# Altium PCB MCORD_AFE.PCBDOC (part 3 of 3)
Units mil, origin at the board's own origin, x right, y up, seen from the top; angles counter-clockwise.
Board outline 2755.91 x 787.4 mil, 4 copper layers (TOP, G1, PWR, BOT), stack 58.685 mil thick; 115 components, 78 nets, 421 pads, 239 vias.
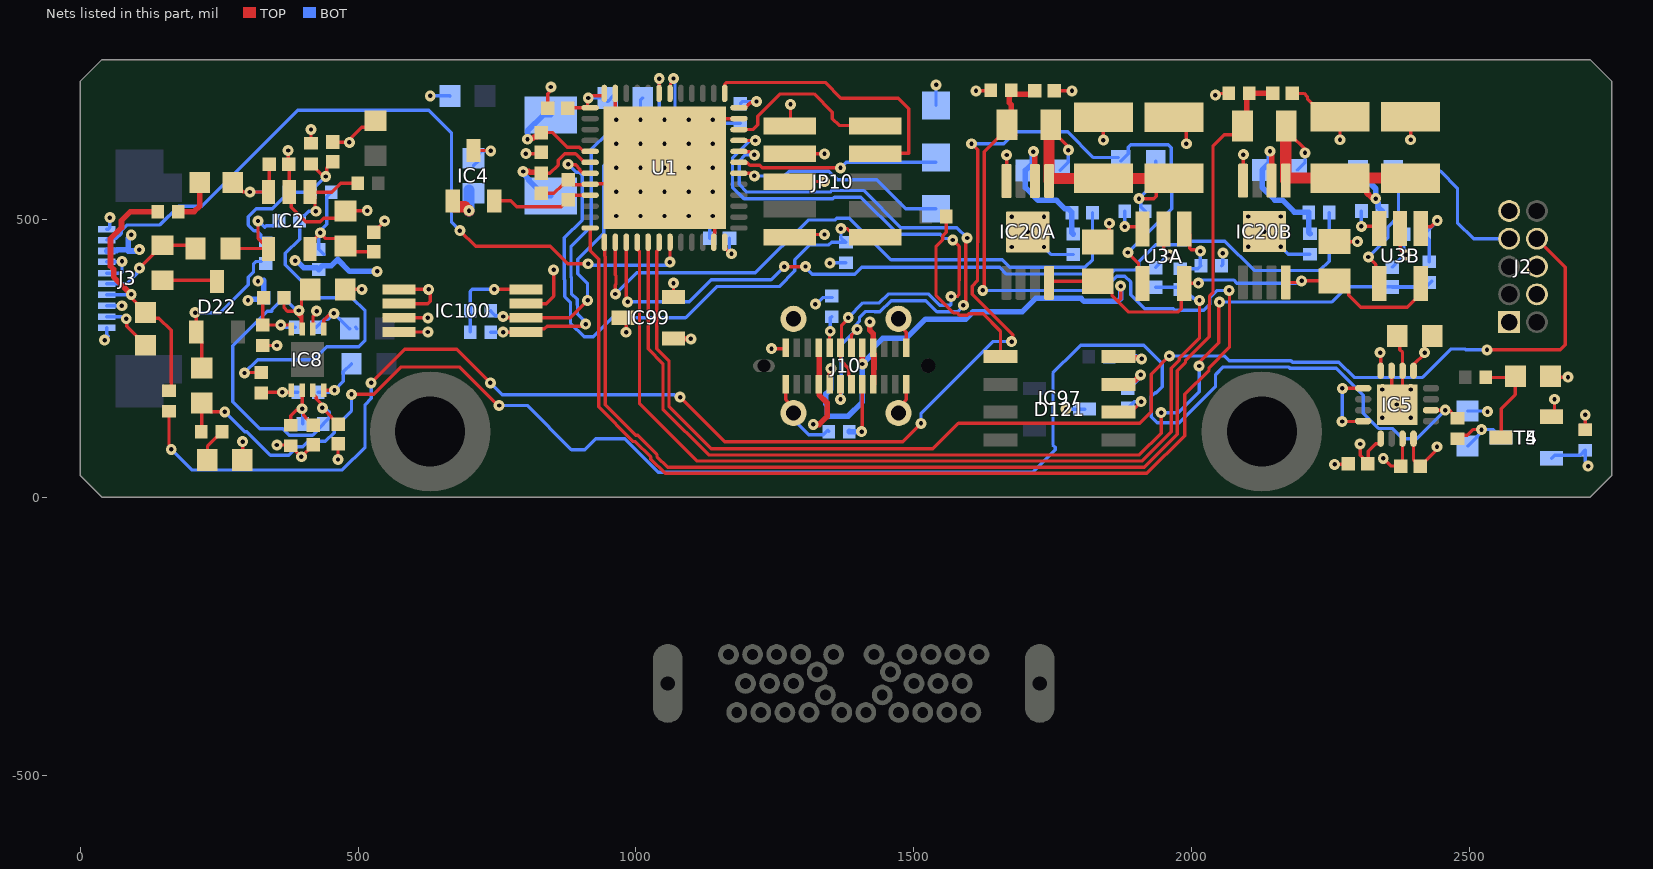
[diagram p4: the nets of this part, all layers, seen from the top]

## Via types
v1: diameter 19.68, hole 7.87, TOP to BOT, tented both sides, 239 vias

## Nets (pads, with @x,y where several pads share a name; then routed paths per layer and width w, separated by ;. In a path a pad name is that pad's centre, name@x,y a point inside that pad or via, vN(x,y) a via of type N, cw(c..) or ccw(c..) an arc to the next point about the centre after c; other vN are vias at no path point) (continued)
GND: C4.1 C16.1 C26.1 C42.1 C43.1 C44.1 C45.1 C46.1 C48.1 C49.1 C54.1 C92.1 C93.1 C94.1 C95.1 C97.1 C98.1 C100.1 C101.1 C130A.1 C130B.1 C131A.1 C131B.1 C132A.1 C132B.1 C133A.1 C133B.1 C134A.1 C134B.1 C284.1 C285.1 C286.1 C290.1 C291.1 C292.1 D121.3 IC2.2 IC4.3 IC5.7 IC5.14 IC5.15 IC5.17 IC8.6 IC20A.4 IC20A.9 IC20B.4 IC20B.9 IC97.2 IC99.3 IC100.1 IC100.2 IC100.3 IC100.4 IC100.7 J2.1 J2.4 J2.6 J3.1 J3.4 J3.5 J3.8 J3.9 J3.10 J10.A1 J10.A12 J10.B1 J10.B12 J10.Shell JP10.3 JP10.5 JP10.9 R18.1 R19.1 R63.2 R67.2 R86A.1 R86B.1 R88A.2 R88B.2 R105.1 R107.1 R108.1 R154A.1 R154B.1 T4.2 T5.2 TP44.1 U1.8 U1.23 U1.35 U1.47 U1.49 U3A.2 U3B.2 | length 4480.9
  TOP w6: v1(83,321) 83.93,320.07 83.93,307.29 C95.1@117.74,273.48 ; C54.1@291.79,67 292.44,67.65 v1(292.44,100) ; R107.1@328.79,272.82 328.94,272.97 v1(353.99,272.97) ; v1(353.99,93.87) 376.7,93.87 378.57,92 R105.1@379.11,92.54 379.11,91.65 384.68,86.08 v1(398,72.76) C97.1@419.11,93.87 ; v1(374.28,623.69) 374.28,600.42 C98.1@375.61,599.09 376.39,598.31 IC2.2@376.39,548.9 380.06,545.23 380.06,521.76 406.21,495.61 431.99,495.61 438.14,501.77 C44.1@468.39,501.77 ; R108.1@415.37,636.61 v1(415.37,661.46) ; IC8.6@418.95,302.63 418.95,324.35 425.58,330.98 v1(425.58,334.68) v1@428.2,337.3 ; C100.1@454.94,639.47 456.08,638.32 v1(484.31,638.32) ; v1(464.03,67.92) 464.03,95.25 C94.1@464.23,95.44 ; C93.1@477.1,373.49 477.53,373.92 v1(506.89,373.92) ; C44.1@477.53,514.8 478.55,513.78 480.22,515.44 v1(516.65,515.44) ; v1@480,639 481.28,639 486.93,644.65 486.93,645.93 506.61,665.61 520.04,665.61 C42.1@531.78,677.35 ; C92.1@528.46,477.36 548,496.9 v1(548,497) ; IC100.4@573.83,297.15 v1(625.81,297.15) ; IC100.3@573.83,322.74 v1(625.81,322.74) ; IC100.2@573.83,348.33 625.81,348.33 629.92,352.44 v1@629.92,365.29 ; IC100.1@573.83,373.92 v1(626.98,373.92) ; IC4.3@707.69,623.69 738.31,623.69 v1(738.79,623.21) ; v1(802,618) 802.11,618.11 826.97,618.11 C4.1@829.47,620.61 ; IC100.7@802.17,348.33 838.44,348.33 852,361.89 v1(852,409) ; C26.1@829.47,547.1 852.56,547.1 867.09,561.64 868.8,561.64 C16.1@878,570.84 886.83,562.01 903.09,562.01 903.38,562.3 916.93,562.3 U1.8@917.66,563.04 918.35,563.73 944.83,563.73 973.66,592.57 v1(1008.21,592.57) v1(1051.52,592.57) ; C292.1@841.54,699.78 841.54,725.6 844.38,728.44 844.38,735.38 v1(847,738) ; U1.47@962.94,726.43 962.94,681.15 v1(964.91,679.18) v1(1008.21,635.87) v1(1051.52,592.57) ; IC99.3@976.72,322.74 982.3,317.16 v1(982.3,296.73) ; U1.23@1140.1,458.71 1140.84,459.44 1140.84,472.99 1141.81,473.96 1141.81,502.28 v1(1138.13,505.95) v1(1094.83,549.26) v1(1051.52,592.57) ; U1.35@1185.38,681.15 1140.1,681.15 v1(1094.83,635.87) v1(1051.52,592.57) ; v1(1244,267.2) 1267.98,267.2 J10.B1@1269.69,268.9 ; J10.A12@1269.69,203.54 1269.69,175.71 1283.46,161.93 J10.Shell@1283.46,151.57 ; JP10.9@1277,467.84 1281.76,472.61 v1(1339.28,472.61) ; JP10.5@1277,567.84 v1(1339.28,567.84) ; JP10.3@1277,617.84 v1(1339.28,617.84) ; J10.Shell@1472.44,151.57 1472.44,161.93 1486.22,175.71 J10.A1@1486.22,203.54 ; J10.Shell@1472.44,320.87 1472.44,310.51 1486.22,296.73 J10.B12@1486.22,268.9 ; v1(1611.86,731.11) 1636.99,731.11 R154A.1@1638.21,732.33 ; IC20A.4@1666.57,568.8 1667.01,569.24 v1(1667.01,615.67) ; C134A.1@1752.97,731.11 v1(1784.46,731.11) ; C130A.1@1795.65,691.09 1802.95,683.79 C130A.1@1840.96,683.79 v1(1840.96,642.45) ; C132A.1@1830.96,459.35 1832.16,459.35 1851.79,478.99 v1(1851.79,492.82) ; IC97.2@1868.44,153.03 1890.03,153.03 v1(1909,172) ; U3A.2@1948.96,482.67 1949.59,482.04 1949.59,445.69 v1(1959.85,435.43) ; C131A.1@1967.96,683.79 1990.37,661.38 v1(1990.37,635.87) ; v1(2042.61,723.41) 2042.61,722.72 2046.31,726.43 R154B.1@2066.65,726.43 ; IC20B.4@2092.36,569.43 2092.8,569.87 v1(2092.8,616.3) ; C134B.1@2180.79,726.43 2201.99,726.43 2208.11,720.3 2208.11,716.48 2240.17,684.42 C130B.1@2266.75,684.42 v1(2266.75,643.08) ; C132B.1@2256.75,459.98 2256.89,459.84 v1(2297.98,459.84) ; v1(2257,59) 2279.96,59 C101.1@2281.15,60.19 ; v1(2344.54,69.97) 2358.32,56.19 2375.14,56.19 C46.1@2376.01,55.32 2379.26,58.57 IC5.7@2379.26,105.41 ; IC5.15@2359.58,227.45 2359.58,176.27 IC5.17@2369.42,166.43 2379.26,176.27 IC5.14@2379.26,227.45 2379.26,260.39 2374.5,265.15 2374.5,285.39 C48.1@2369.57,290.32 ; U3B.2@2374.75,483.3 2375.38,482.67 2375.38,446.32 v1(2385.64,436.05) ; v1(2393.75,643.08) C131B.1@2393.75,684.42 ; C45.1@2645.28,217.61 2646.89,216 v1(2677,216) ; T4.2@2647.25,144.78 2652.58,150.11 v1(2652.58,176.27) ; v1(2708,148) 2708,121.75 R63.2@2708.21,121.54
  BOT w6: v1(44.13,282.58) 44.13,283.09 50.41,289.37 47.69,292.09 J3.10@47.69,305.12 ; J3.9@47.69,324.8 75.5,324.8 79.3,321 v1(83,321) ; J3.8@47.69,344.49 v1(75.16,344.49) ; J3.5@47.69,403.15 73.23,403.15 75.5,405.41 v1(75.5,424.25) 74.98,423.74 48.21,423.74 J3.4@47.69,423.23 ; J3.1@47.69,482.28 50.69,482.28 53.6,485.19 v1(53.6,502.95) ; v1(629.92,721.98) 665.09,721.98 C43.1@665.57,721.5 ; C285.1@707.69,596.13 716.89,605.34 716.89,617.59 722.52,623.21 v1(738.79,623.21) ; v1(1008.21,679.18) 1008.21,714.27 C286.1@1012.15,718.21 ; C290.1@1132.88,466.1 1132.88,497 1138.13,502.25 v1(1138.13,505.95) ; v1(1138.13,679.18) 1141.81,679.18 1148.49,672.5 C291.1@1188,672.5 ; J10.Shell@1283.46,151.57 1283.46,139.89 1311.2,112.16 1337.39,112.16 1345.52,120.29 1346.91,118.9 R18.1@1346.91,118.11 ; v1@1322.82,344.66 v1@1322.82,346.07 ; v1(1322.82,347.47) v1@1322.82,346.07 ; R19.1@1353.06,359.13 1335.89,359.13 v1@1322.82,346.07 ; TP44.1@1540,704.94 v1(1540,741.75) ; v1(1734.09,450.1) 1747.63,436.57 R86A.1@1786.96,436.57 ; v1(1773.95,158.35) D121.3@1807.42,158.35 ; C284.1@1885.15,160.32 1896.83,172 v1(1909,172) ; C133A.1@1934.96,413.38 1935.16,413.38 1946.13,424.35 1946.13,424.55 1957.01,435.43 v1(1959.85,435.43) ; R88A.2@2053.56,416.12 2056,418.56 v1(2056,439) ; v1(2159.88,450.73) 2173.42,437.2 R86B.1@2212.75,437.2 ; C133B.1@2360.75,414.01 2360.95,414.01 2371.92,424.98 2371.92,425.18 2382.8,436.05 v1(2385.64,436.05) 2385.64,439.76 2381.84,443.56 R88B.2@2381.84,472.87 ; C49.1@2496.23,155.2 2530.8,155.2 v1(2532,154) ; T5.2@2647.25,69.97 2652.94,75.67 2698.56,75.67 2707.42,84.53 R67.2@2708.21,84.53 2708.21,64.5 2713.01,59.7 v1(2713.01,56)
  other v1: 2342.99,142.65 2393.99,142.65 2368.97,166.88 2342.99,193.72 2393.99,193.72 1675.83,450.1 2101.61,450.73 1704.96,477.27 2130.75,477.9 1675.83,504.43 1734.09,504.43 964.91,505.95 1008.21,505.95 1051.52,505.95 1094.83,505.95 2101.61,505.06 2159.88,505.06 964.91,549.26 1008.21,549.26 1051.52,549.26 1138.13,549.26 964.91,592.57 1094.83,592.57 1138.13,592.57 964.91,635.87 1051.52,635.87 1138.13,635.87 1051.52,679.18 1094.83,679.18
I_SIPM_MEAS0: C133A.2 R68A.2 U1.16 | length 1659.3
  TOP w6: U1.16@1002.31,458.71 1002.31,446.84 1006.39,442.76 1006.39,168.69 1110.08,65 1910.29,65 1962.84,117.55 1962.84,231.9 1977.69,246.75 1977.69,250.32 2014,286.63 v1(2014,354)
  BOT w6: C133A.2@1934.96,377.55 1975.57,377.55 R68A.2@1979.39,373.73 1987.8,365.33 1995.34,365.33 2004.05,356.62 2011.38,356.62 v1(2014,354)
I_SIPM_MEAS1: C133B.2 R68B.2 U1.17 | length 2001.6
  TOP w6: U1.17@1021.99,458.71 1021.99,266.8 1048.6,240.19 1048.6,158.16 1130.76,76 1905.73,76 1945,115.27 v1(1945,152) ; v1@1944,152 v1@1944,153 ; v1@2013.24,232.5 v1(2013.24,236.15) 2013.24,242.38 2048.5,277.65 2048.5,349.5 v1(2050,351)
  BOT w6: v1(1945,152) 1975.83,152 2013.24,189.41 v1(2013.24,236.15) ; v1(2050,351) 2050.24,351.24 2252.33,351.24 2279.49,378.39 2403.75,378.39 2404.35,377.79 ; C133B.2@2360.75,377.79 2404.35,377.79 ; R68B.2@2431.84,388.37 2421.25,377.79 2404.35,377.79
NetC4_2: C4.2 Q1.1 U1.5 | length 200.8
  TOP w6: C4.2@829.47,656.04 850.52,656.04 876.72,629.84 898.05,629.84 905.79,622.09 U1.5@917.66,622.09
  TOP w10: v1(805,644) 806.85,645.85 814.75,645.85 817.74,648.84 822.27,648.84 C4.2@829.47,656.04
  BOT w10: v1(805,644) 805,659.28 833.46,687.75 Q1.1@847,687.75
NetC26_2: C26.2 Q1.2 U1.6 | length 220.4
  TOP w6: C26.2@829.47,582.54 845.12,582.54 860.16,597.58 860.16,606.39 871.61,617.84 891.4,617.84 906.83,602.41 U1.6@917.66,602.41
  TOP w10: v1(797,586) 807,586 808.73,584.27 827.74,584.27 C26.2@829.47,582.54
  BOT w10: v1(797,586) 797,582.27 807.87,571.41 807,570.54 835.46,542.08 Q1.2@847,542.08
NetC44_2: C44.2 C92.2 IC2.5 L1.1 R100.2 | length 257.2
  TOP w6: IC2.5@413.8,446.54 413.8,456.38 432.39,474.98 v1(432.39,475.77) ; v1@432.39,473.91 440.76,465.55 C44.2@468.39,465.55 ; C44.2@477.53,451.8 487.8,441.54 C92.2@528.46,441.54
  BOT w6: L1.1@438.61,436.71 438.61,437.1 429.79,445.92 L1.1@429.4,445.92 429.4,469.07 432.39,472.06 v1(432.39,475.77) 432.39,479.47 443.57,490.64 443.57,540.48 R100.2@451.98,548.9
NetC45_2: C45.2 R110.1 T4.3 | length 186.3
  TOP w6: R110.1@2528.91,215.43 2572.23,215.43 2582.29,225.49 2582.29,184.72 2556.7,159.13 T4.3@2556.7,107.38
NetC49_2: C49.2 R66.1 T5.3 | length 133.4
  TOP w6: R66.1@2478.91,103.95 2477.89,104.97 R66.1@2478.12,105.2 2484.39,111.47 2495.81,111.47 2505.99,121.65 v1(2521.18,121.65)
  BOT w6: C49.2@2496.23,92.21 2497.21,92.21 2512.91,107.91 2512.91,108.89 2518.57,114.54 2518.57,119.04 v1(2521.18,121.65) 2542.42,121.65 T5.3@2556.7,107.38
NetC54_2: C54.2 R71.1 | length 62.5
  TOP w6: C54.2@228.8,67 229.24,67.44 229.24,92.17 245.97,108.91 246.76,108.91 255.17,117.32 R71.1@255.17,118.11
NetC93_2: C93.2 C94.2 IC8.3 IC8.7 L6.1 R46.2 R49.2 | length 738.1
  TOP w6: R46.2@366.98,359.07 366.98,340.96 373.14,334.81 v1@389.01,334.81 ; v1(393.71,335.8) 389.01,331.1 397.35,322.76 397.35,304.55 IC8.7@399.27,302.63 399.27,326.54 396.06,329.75 396.06,338.16 398.41,340.51 398.41,357.79 C93.2@414.11,373.49 ; IC8.3@418.95,192.39 418.95,185.5 420.87,183.58 421.2,183.58 424.72,180.07 424.72,176.85 v1@438.28,163.29 ; v1(435.77,160.77) 453.05,143.49 453.05,142.64 464.03,131.66 C94.2@464.23,131.66
  BOT w6: L6.1@366.59,359.07 L6.1@366.59,358.68 ; v1@386.85,338.42 L6.1@366.59,358.68 ; v1(435.77,160.77) 439.48,160.77 444.29,155.96 445.61,155.96 448.26,153.31 448.26,143.1 437.61,132.45 437.61,130.88 418.2,111.46 376.32,111.46 364.8,122.97 322.92,122.97 274.47,171.43 274.47,272.82 336.45,334.81 345.19,334.81 345.19,337.28 L6.1@366.59,358.68
NetC96_1: C96.1 C98.2 IC2.3 R106.1 | length 163.3
  TOP w6: C96.1@274.47,565.94 274.47,553.13 277.35,550.24 292.44,550.24 293.68,549 v1(305.53,549) 338.89,549 IC2.3@338.99,548.9 340.17,550.08 C98.2@340.17,599.09
  BOT w6: v1(305.53,549) 338.89,549 R106.1@338.99,548.9
NetC96_2: C96.2 R104.2 | length 84.8
  TOP w10: R104.2@176.83,513.78 205.17,513.78 215.41,524.01 C96.2@215.41,565.94
NetC97_2: C97.2 IC8.2 R49.1 R105.2 | length 141.4
  TOP w6: R105.2@379.11,129.55 379.11,146.87 388.78,156.54 396.81,156.54 v1(399.42,159.16) ; IC8.2@399.27,192.39 399.42,192.24 v1(399.42,159.16) ; C97.2@419.11,130.09 418.91,130.09 407.94,141.07 407.94,141.26 402.04,147.16 402.04,156.54 v1(399.42,159.16)
  BOT w6: v1(399.42,159.16) 400.61,157.98 R49.1@400.61,131.66
NetC99_1: C99.1 IC5.10 R66.2 R71.2 | length 3036.1
  TOP w6: R71.2@218.17,118.11 218.95,118.9 C99.1@218.95,169.29 234.66,153.59 239.11,153.59 239.15,153.54 v1(260.29,153.54) ; v1(488.32,185.02) 528.31,185.02 577.67,234.38 682.46,234.38 751.83,165 v1(754,165) ; IC5.10@2430.44,156.59 v1(2456.03,156.59) 2463.74,156.59 2468.91,151.41 2468.91,150.62 2477.33,142.21 R66.2@2478.12,142.21
  BOT w6: v1(260.29,153.54) 295.99,117.84 299.83,117.84 342.46,75.22 375.22,75.22 390.61,90.6 401,90.6 410.86,100.46 441.34,100.46 457.03,116.15 457.03,124.57 488.32,155.86 v1(488.32,185.02) ; v1(754,165) 804.2,165 884.01,85.19 907.67,85.19 927.48,105 980.31,105 1040.31,45 1714.16,45 1754.16,85 1754.16,89.97 1750.33,93.8 1750.33,223.51 1791.12,264.3 1800.06,273.24 1913.64,273.24 1946.84,240.04 1946.84,198.61 1936.39,188.16 1933.92,188.16 1927.16,181.39 1927.16,144.61 1937.61,134.16 1977.6,134.16 2042.84,199.4 2042.84,220.75 2056.47,234.38 2174.14,234.38 2176.57,231.95 2260.23,231.95 2308.39,183.79 2308.39,151.14 2335.84,123.7 2360.97,123.7 2379.26,105.41 2404.85,105.41 v1(2456.03,156.59)
NetC99_2: C99.2 D22.1 R51.1 | length 276.2
  TOP w6: v1@209.11,330.61 D22.1@209.11,297.15 209.11,289.28 218.95,279.43 C99.2@218.95,232.28
  BOT w6: v1(207,332) 252.43,332 302.29,381.86 302.29,396.13 312,405.84 312,420 316,424 R51.1@326,424
NetC100_2: C100.2 R51.2 R100.1 R106.2 R108.2 | length 299.8
  TOP w6: R108.2@415.37,599.6 416.16,599.6 424.57,591.18 424.57,590.4 v1@435.35,579.62 ; v1(442,577) 443.76,578.76 443.76,592.27 454.74,603.25 454.94,603.25 C100.2@451.29,599.6
  BOT w6: R51.2@334,457.5 333.21,457.5 324.8,465.92 324.8,471.97 317.61,479.16 312.74,479.16 302.29,489.61 302.29,504.39 316.82,518.92 346.02,518.92 366.8,539.69 367.58,539.69 376,548.11 R106.2@376,548.9 R100.1@414.98,548.9 423.39,557.32 423.39,558.39 v1(442,577)
NetC130A_2: C130A.2 C131A.2 IC20A.1 R85A.2 R94A.2 R152A.2 R153A.2 | length 600.5
  TOP w6: R94A.2@1738.52,668.31 1753.23,653.6 1754.45,653.6 1777.97,630.08 v1(1777.97,624.54) ; v1(1905,537) 1931.41,537 1935.9,541.49 1935.9,549.98 1959.47,573.55 C131A.2@1967.96,573.55
  TOP w10: C131A.2@1967.96,573.55 C131A.2@1979.39,573.55
  TOP w20: IC20A.1@1743.35,568.8 IC20A.1@1743.35,572.41 ; R94A.2@1746.46,651.27 1743.35,648.16 IC20A.1@1743.35,572.41 ; C131A.2@1959.47,573.55 C130A.2@1840.96,573.55 1744.49,573.55 IC20A.1@1743.35,572.41
  BOT w6: R153A.2@1763.68,587.93 1777.97,602.21 v1@1777.97,619 ; R85A.2@1916.46,514.27 1908.05,522.68 1908.05,530.25 1905,533.3 v1(1905,537) 1935.45,567.45 R152A.2@1935.45,604.72
NetC130B_2: C130B.2 C131B.2 IC20B.1 R85B.2 R94B.2 R152B.2 R153B.2 | length 558.6
  TOP w6: R94B.2@2162.24,667.84 2162.24,665.87 2176.96,651.16 2178.17,651.16 2203.76,625.57 v1(2203.76,619.63)
  TOP w10: C130B.2@2266.75,574.18 2293.32,574.18 2314.9,552.61 2314.9,547.7 2323.75,538.85 2329.15,538.85 v1(2331,537)
  TOP w20: IC20B.1@2169.13,569.43 IC20B.1@2169.13,573.04 ; R94B.2@2172.24,651.9 2169.13,648.79 IC20B.1@2169.13,573.04 ; C130B.2@2266.75,574.18 2170.28,574.18 IC20B.1@2169.13,573.04 ; C130B.2@2293.32,574.18 C131B.2@2393.75,574.18
  BOT w6: R153B.2@2189.47,588.56 2203.76,602.84 v1(2203.76,619.63)
  BOT w10: R152B.2@2299.26,586.69 2299.26,584.72 2311.98,572 2313.95,572 2331,554.95 v1(2331,537) 2331,534.38 2335.84,529.54 2335.84,521.31 R85B.2@2342.25,514.9
NetD22_3: D22.3 R29.1 | length 99.6
  TOP w6: R29.1@148,390.28 243.93,390.28 D22.3@246.51,387.7
NetIC2_1: IC2.1 R47.1 R52.2 R101.2 | length 760.8
  TOP w6: v1(295.73,223.54) 296.51,224.33 R47.1@326.11,224.33 ; v1(424.18,514.45) 422.61,516.02 422.61,540.09 IC2.1@413.8,548.9 453.17,548.9 469.09,564.82 R52.2@499.5,564.82
  BOT w6: v1(295.73,223.54) 319.7,247.51 420.87,247.51 443.99,270.63 501.23,270.63 512.65,282.05 512.65,335.2 488.78,359.07 428.23,359.07 369.16,418.14 369.16,438.63 394.9,464.37 R101.2@394.9,497.72 394.9,498.5 403.31,506.92 404.1,506.92 411.63,514.45 v1(424.18,514.45)
NetIC2_4: IC2.4 R101.1 R102.2 | length 173.6
  TOP w6: R102.2@270.54,447.44 IC2.4@338.09,447.44 ; v1(320.13,497) 320.13,465.39 IC2.4@338.09,447.44 ; IC2.4@338.99,446.54 338.39,447.13 IC2.4@338.09,447.44
  BOT w6: v1(320.13,497) 320.77,497 332,485.77 334.74,488.51 349.47,488.51 357.89,496.93 R101.1@357.89,497.72
NetIC5_1: IC5.1 IC5.4 | length 135.5
  TOP w6: v1(2270.53,136.22) 2307.71,136.22 IC5.4@2308.39,136.9 ; v1(2270.99,195.96) IC5.1@2308.39,195.96
  BOT w6: v1(2270.53,136.22) 2270.99,136.69 v1(2270.99,195.96)
NetIC8_1: IC8.1 R45.1 R47.2 | length 84.2
  TOP w6: R47.2@326.11,187.32 327.6,188.81 v1(364.01,188.81) 377.66,188.81 379.58,190.73 IC8.1@379.58,192.39
  BOT w6: v1(364.01,188.81) R45.1@391.59,188.81
NetIC8_4: IC8.4 R45.2 R48.1 | length 110.1
  TOP w6: IC8.4@438.64,192.39 v1(457.73,192.39)
  BOT w6: R45.2@428.61,188.82 450.46,188.82 454.03,192.39 v1(457.73,192.39) 473.61,208.27 473.61,225.45 R48.1@488.32,240.17
NetIC8_5: IC8.5 R50.2 R103.1 | length 124.8
  TOP w6: IC8.5@438.64,302.63 438.64,318.64 450.61,330.61 v1(456.53,330.61)
  BOT w6: R50.2@424.61,305.82 438.98,320.19 446.11,320.19 v1(456.53,330.61) 484.52,302.63 R103.1@485.15,303.26 ; R103.1@495.84,305.57 R103.1@498.14,303.26
NetIC8_8: IC8.8 R46.1 R50.1 R107.2 | length 134.9
  TOP w6: R46.1@329.98,359.07 328.79,357.89 R107.2@328.79,309.83 v1(361,309.83) 377.66,309.83 379.58,307.91 IC8.8@379.58,302.63
  BOT w6: v1(361,309.83) 363.18,309.83 367.19,305.82 R50.1@387.61,305.82
NetIC20A_2: IC20A.2 R86A.2 R87A.2 R153A.1 | length 266.8
  TOP w10: v1(1714.96,621.74) 1714.96,619.12 1717.75,616.32 IC20A.2@1717.75,568.8
  BOT w10: v1(1714.96,621.74) 1713.41,620.19 1713.41,600.65 R153A.1@1700.69,587.93 1700.69,557.03 1723.77,533.95 1756.64,533.95 1771.79,518.8 1778.04,518.8 1784.46,512.39 R87A.2@1784.46,511.6 1784.46,476.08 R86A.2@1786.96,473.57
NetIC20B_2: IC20B.2 R86B.2 R87B.2 R153B.1 | length 266.8
  TOP w10: v1(2140.75,622.37) 2140.75,619.75 2143.54,616.95 IC20B.2@2143.54,569.43
  BOT w10: v1(2140.75,622.37) 2139.2,620.82 2139.2,601.28 R153B.1@2126.48,588.56 2126.48,557.66 2149.56,534.58 2163.07,534.58 2184.64,513.02 2210.24,513.02 R87B.2@2210.24,512.23 2210.24,476.71 R86B.2@2212.75,474.2
NetIC97_4: IC97.4 R416.1 | length 102.7
  TOP w10: IC97.4@1868.44,253.03 1870.72,250.75 1907.93,250.75 v1(1909.78,248.9)
  BOT w10: R416.1@1851.79,253.03 1899.08,253.03 1901.36,250.75 1907.93,250.75 v1(1909.78,248.9)
NetIC97_5: IC97.5 R420.1 | length 340.1
  TOP w6: R420.1@1558.5,505.06 1558.5,476.42 1552.16,470.07 1552.16,463.58 1540,451.43 1540,362.73 1571.29,331.47 1577.79,331.47 1581.75,327.51 1596.53,327.51 1598.85,329.84 1625.01,329.84 1655.84,299.01 IC97.5@1655.84,253.03
NetJ10_A5: J10.A5 R18.2 | length 109.1
  TOP w6: v1(1406,118) 1406,120.36 1407.21,121.56 1407.21,203.27 J10.A5@1407.48,203.54
  BOT w10: R18.2@1383.91,118.9 R18.2@1383.91,118.11 1383.97,118.06 1405.94,118.06 v1(1406,118)
NetJ10_B5: J10.B5 R19.2 | length 60.9
  TOP w6: J10.B5@1348.43,268.9 1348.21,269.11 1348.21,297.21 v1(1349.61,298.61) v1@1351,300
  BOT w6: v1(1349.61,298.61) 1349.61,323.4 1350.21,322.8 R19.2@1352.28,324.86
NetR44_2: R44.2 R152A.1 U3A.4 | length 2990.4
  TOP w6: R44.2@159.9,154.72 159.9,93.86 164,89.75 v1(164,86.05) ; v1(523.68,205.62) 584.06,266 677.62,266 v1(738,205.62) ; v1(1079.59,180.07) 1159.65,100 1480.13,100 v1(1512.96,132.83) ; v1(1603.8,635.87) 1614.84,624.84 1614.84,458.58 1614.5,458.24 1614.5,389.15 1605.16,379.8 1605.16,365.25 1677.74,292.66 1677.74,281.74 v1(1676,280) ; v1(1885.15,440.2) 1904.13,421.23 1904.13,391.68 U3A.4@1911.56,384.24
  BOT w6: v1(164,86.05) 200.97,49.08 471.84,49.08 512.65,89.9 512.65,166.68 523.68,177.71 v1(523.68,205.62) ; v1(738,205.62) 759.42,184.2 1069.23,184.2 1070.74,182.69 1076.97,182.69 v1(1079.59,180.07) ; v1(1512.96,132.83) 1512.96,151.34 1641.62,280 v1(1676,280) ; v1(1603.8,635.87) 1661.81,635.87 1683.46,657.53 1776.67,657.53 1823.15,611.04 R152A.1@1867.48,611.04 ; R152A.1@1872.46,604.72 1885.61,617.88 1885.61,629.69 1890.17,634.25 1957.43,634.25 1963.01,628.67 1963.01,574.26 1963.72,573.55 1963.72,518.77 v1(1885.15,440.2)
NetR68A_1: R68A.1 R88A.1 U3A.1 | length 126.7
  TOP w6: U3A.1@1986.36,482.67 1996.16,472.87 1996.16,447.82 1999.08,444.9 2013.24,444.9 v1(2015.37,442.76)
  BOT w6: R68A.1@1979.39,410.74 2011.18,410.74 R88A.1@2016.55,416.12 2015.37,417.3 v1(2015.37,442.76)
NetR68B_1: R68B.1 R88B.1 U3B.1 | length 122.6
  TOP w6: U3B.1@2412.15,483.3 2415.19,486.34 2430.43,486.34 v1(2441.68,497.58)
  BOT w6: R68B.1@2427.36,423.37 2427.36,463.57 2418.84,472.09 R88B.1@2418.84,472.87 2418.84,473.66 2427.26,482.08 2441.68,496.5 v1(2441.68,497.58)
NetR85A_1: R85A.1 U3A.3 | length 61.3
  TOP w6: v1(1879.46,486.69) 1907.54,486.69 U3A.3@1911.56,482.67
  BOT w6: v1(1879.46,486.69) R85A.1@1879.46,514.27
NetR85B_1: R85B.1 U3B.3 | length 61.3
  TOP w6: v1(2305.24,487.32) 2333.32,487.32 U3B.3@2337.35,483.3
  BOT w6: v1(2305.24,487.32) R85B.1@2305.24,514.9
P3V3: C46.2 C48.2 C101.2 C286.2 C290.2 C291.2 C292.2 IC5.5 IC5.8 IC5.13 IC5.16 IC99.2 IC100.8 JP10.1 R422.2 R425.2 R430.1 U1.1 U1.24 U1.36 U1.48 | length 855.2
  TOP w6: v1(745.09,373.92) IC100.8@802.17,373.92 ; C292.2@878,699.78 879.05,700.83 U1.1@914.78,700.83 ; U1.1@917.66,700.83 U1.1@914.78,700.83 ; U1.48@943.25,726.43 943.25,723.78 941.48,722 919.32,722 917.66,720.34 917.66,718.21 915.53,718.21 913,715.68 913,702.61 U1.1@914.78,700.83 ; IC99.2@1067.27,360.14 1067.68,360.56 v1(1067.68,385) ; U1.24@1159.79,458.71 1159.79,448.92 1170.71,438 v1(1172,438) ; U1.36@1185.38,700.83 1197.05,700.83 1206.11,709.9 1214.9,709.9 v1(1217,712) ; JP10.1@1277,667.84 1278.18,669.03 v1(1278.18,706.62) ; v1(2302.96,95.7) 2302.96,75.62 2310.36,68.22 2317.88,60.7 C101.2@2317.37,60.19 ; C101.2@2316.98,60.19 C101.2@2317.37,60.19 ; v1(2339,260) 2339.89,259.11 IC5.16@2339.89,227.45 ; IC5.5@2339.89,105.41 2339.89,99.12 2337.21,96.44 2330.92,96.44 2317.37,82.89 C101.2@2317.37,60.19 ; IC5.8@2398.95,105.41 2398.95,67.82 C46.2@2411.44,55.32 2441.14,85.02 v1(2441.14,90.73) ; IC5.13@2398.95,227.45 2398.95,237.88 2418.93,257.87 2418.93,276.69 C48.2@2432.56,290.32
  BOT w6: R422.2@701.78,297.15 R425.2@701.78,335.54 701.78,370.22 705.48,373.92 v1(745.09,373.92) ; v1(914.19,718.21) 942.53,718.21 948.96,711.78 959.17,721.98 C286.2@962.94,718.21 ; C290.2@1168.31,466.1 1168.31,444.9 1172,441.21 v1(1172,438) ; C291.2@1188,707.93 1192.07,712 v1(1217,712) ; v1(1349,421) 1349.7,421.7 R430.1@1377.95,421.7
  other v1: 2418.93,260.18
P3V3REF: C16.2 IC4.2 U1.9 | length 185.4
  TOP w6: IC4.2@745.09,533.14 775.23,533.14 785.6,522.77 865.36,522.77 C16.2@878,535.41 885.95,543.35 U1.9@917.66,543.35
P5V0: C284.2 C285.2 IC4.1 IC97.3 IC99.1 J2.9 J3.3 J10.A4 J10.A9 J10.B4 J10.B9 L1.2 L6.2 | length 779.3
  TOP w10: IC99.1@1067.27,285.34 1067.52,285.09 1098.51,285.09 v1(1098.76,284.84) ; v1(1319,131) 1319.21,130.79 1329.58,130.79 1343.84,145.05 1343.84,169.93 1329.65,184.13 1329.65,202.64 J10.A9@1328.74,203.54 1329.65,204.45 1329.65,222.17 1329.84,222.37 1329.84,239.63 1329.65,239.83 1329.65,267.99 J10.B4@1329.16,268.48 ; v1(1420.98,315.35) 1420.98,300.02 1426.74,294.26 1426.74,269.32 J10.B9@1427.17,268.9 1427.17,258.07 1428.32,256.91 1428.32,231 1428.07,230.75 1428.07,204.45 J10.A4@1427.17,203.54 ; IC97.3@1868.44,203.03 IC97.3@1873.42,198.05 ; IC97.3@1898.06,210.06 v1(1908,220)
  TOP w20: IC4.1@670.28,533.14 670.28,525.27 673.08,522.47 692.57,522.47 v1(699.6,515.44)
  BOT w10: J3.3@47.69,442.91 48.6,443.82 65.58,443.82 66.86,445.1 84.13,445.1 86.31,442.91 ; v1(92,472) 86.31,466.31 86.31,442.91 ; v1(106.75,445.47) 104.13,445.47 101.57,442.91 86.31,442.91 ; v1(302,354) 303.85,355.85 327.15,355.85 L6.2@330.37,359.07 330.37,389.89 329.22,388.74 v1(320.13,388.74) ; v1(387,425.53) 389.62,425.53 402.2,412.96 426.14,412.96 L1.2@429.4,409.69 436.21,416.51 452.24,416.51 463.58,427.84 485.01,406.4 v1(534.46,406.4) ; C284.2@1885.15,195.75 1909.4,220 v1(1908,220)
  BOT w20: v1(699.6,515.44) C285.2@699.6,552.62
P70V0: C132A.2 C132B.2 IC20A.8 IC20B.8 J10.A8 J10.B8 U3A.5 U3B.5 | length 1722.8
  TOP w6: IC20A.8@1743.35,385.73 1746.1,388.49 C132A.2@1830.96,388.49 1836.86,388.49 1856.5,368.85 1856.5,362.94 1867.24,352.21 ; v1(2012,385) 1987.12,385 U3A.5@1986.36,384.24 1981.16,379.04 1981.16,339.32 1974.9,333.06 1886.38,333.06 1867.24,352.21 ; IC20B.8@2169.13,386.36 2191.12,386.36 2193.88,389.12 v1(2197.58,389.12) C132B.2@2256.75,389.12 2262.65,389.12 2282.29,369.48 2282.29,363.57 2304.02,341.85 2387.83,341.85 2412.15,366.17 U3B.5@2412.15,384.87 ; 1867.24,352.21 1872.19,357.16 ; 1867.24,352.21 1872.19,357.16 ; 1872.19,357.16 v1(1872.19,379.84) 1872.19,357.16
  TOP w10: J10.A8@1348.43,203.54 1349.33,204.45 1349.33,229.81 v1(1350.68,231.16) ; v1(1407.48,239.63) J10.B8@1407.48,268.9
  BOT w6: v1(2012,385) 2017.83,390.83 2075.15,390.83 2080.98,385 2187.23,385 2188.73,386.5 2194.96,386.5 v1(2197.58,389.12)
  BOT w10: v1(1350.68,231.16) 1350.68,194.6 1341.84,185.76 1341.84,167.63 1343.84,165.63 1343.84,149.82 1348,145.66 1381.81,145.66 1407.48,171.34 v1(1407.48,239.63) 1426.95,259.11 1426.95,269.11 1444.15,286.3 1444.2,286.24 1486.78,286.24 1520.97,320.43 1593.37,320.43 1606.41,333.47 1694.9,333.47 1719.09,357.66 1801.02,357.66 1806.45,352.24 1867.21,352.24 1872.19,357.21 v1(1872.19,379.84)
RESETn: JP10.10 R430.2 U1.7 | length 1049.2
  TOP w6: v1(878,599) 879.05,597.95 891.6,597.95 899.2,590.35 899.2,588.16 902.72,584.65 903.87,584.65 905.79,582.72 U1.7@917.66,582.72 ; v1(1368.81,483.3) 1380.53,483.3 1393.85,469.98 1428.41,469.98 JP10.10@1430.54,467.84
  BOT w6: v1(878,599) 892.46,584.54 897.97,584.54 903.24,579.27 903.24,498.66 871.16,466.57 871.16,391.75 872,390.91 872,361.06 882.16,350.9 882.16,313.36 907,288.52 923.17,288.52 957.39,322.74 1089.25,322.74 1145.49,378.98 1257.7,378.98 1285.69,406.97 1285.69,426.76 1312.69,453.76 1347.08,453.76 1352.03,458.71 R430.2@1377.23,458.71 ; v1(1368.81,483.3) 1368.81,467.13 R430.2@1377.23,458.71 ; R430.2@1377.95,458.71 R430.2@1377.23,458.71
Rx: TP1.1 U1.31 | length 363
  TOP w6: U1.31@1185.38,602.41 1186.11,601.67 1200.68,601.67 1205.2,597.16 1222.75,597.16 1227.34,592.57 v1(1368.11,592.57)
  BOT w6: v1(1368.11,592.57) 1378.39,602.84 TP1.1@1540,602.84
SCL1: IC100.6 R425.1 U1.42 | length 728.2
  TOP w6: v1(761,325) 763.26,322.74 IC100.6@802.17,322.74 881.74,322.74 v1(913,354) ; U1.42@1061.36,726.43 1062.1,727.16 1062.1,743.96
  BOT w6: R425.1@738.79,335.54 738.79,334.75 747.2,326.33 759.67,326.33 v1(761,325) ; v1(913,354) 913,383.85 895.16,401.69 895.16,427.84 941.95,474.63 941.95,596.26 962.72,617.03 1016.02,617.03 1031.27,632.29 1031.27,642.27 1046.53,657.53 1056.51,657.53 1070.36,671.38 1070.36,742.9 1070.3,742.96 1070.3,750.64 v1(1067.68,753.25)
SDA1: IC100.5 R422.1 U1.43 | length 758
  TOP w6: v1(761,297) 802.02,297 IC100.5@802.17,297.15 808.03,303.01 835.36,303.01 840.2,307.84 902.86,307.84 906.26,311.25 v1(909.51,311.25) ; U1.43@1041.68,726.43 1042,726.75 v1(1042,753)
  BOT w6: R422.1@738.79,297.15 738.94,297 v1(761,297) ; v1(909.51,311.25) 909.51,314.49 894.92,329.08 894.92,345.43 894.16,346.2 894.16,355.87 884,366.03 884,395.88 883.16,396.72 883.16,450.48 919.83,487.16 919.83,625.87 949.15,655.19 1010.87,655.19 1032.68,677 1032.68,686.99 1042,696.31 v1(1042,753)
SIPM_E_A: J3.6 R29.2 R102.1 | length 195.1
  TOP w6: v1(106.75,412.2) 131.32,436.76 131.32,438.55 146.04,453.27 R29.2@148,453.27 201.72,453.27 R102.1@207.55,447.44
  BOT w6: J3.6@47.69,383.86 83.63,383.86 102.03,402.26 102.03,403.78 106.75,408.49 v1(106.75,412.2)
SIPM_E_C: C95.2 J3.7 R44.1 R104.1 | length 485.9
  TOP w6: v1(92,365) 93.55,363.45 93.55,356.72 C95.2@117.74,332.54 128.1,322.18 141.93,322.18 164,300.1 164,195.84 R44.1@159.9,191.73
  TOP w10: v1(92,365) 60.46,396.54 60.46,409.81 54.65,415.62 54.65,465.13 74.44,484.92 74.44,497.67 90.55,513.78 R104.1@139.82,513.78
  BOT w6: J3.7@47.69,364.17 91.17,364.17 v1(92,365)
SIPM_VCC_EXT: J2.7 R152B.1 U3B.4 | length 532.1
  TOP w6: v1(2317.66,432.12) 2330.99,418.79 2330.99,391.24 U3B.4@2337.35,384.87
  BOT w6: v1(2317.66,432.12) 2353.1,467.55 2353.1,486.24 2371.92,505.06 2371.92,577.02 R152B.1@2362.25,586.69 2447.55,586.69 2478,556.23 2478,494 2507.04,464.96 J2.7@2571,464.96
SWCLK: JP10.4 U1.37 | length 518.1
  TOP w6: U1.37@1159.79,726.43 1159.79,742.6 1163.3,746.11 1340.59,746.11 1368.81,717.89 1471.95,717.89 1490.92,698.91 1490.92,618.8 JP10.4@1421.26,618.8
SWDIO: JP10.2 U1.34 | length 301.7
  TOP w6: U1.34@1185.38,661.46 1210.62,661.46 1219.44,670.28 1219.44,685.55 1259.35,725.46 1320.44,725.46 1353.06,692.84 1353.06,681.15 1365.41,668.8 JP10.2@1421.26,668.8
TEMP_EXT: J2.8 U1.18 | length 2312.9
  TOP w6: U1.18@1041.68,458.71 1041.68,446.84 1037.6,442.76 1037.6,266.75 1059.6,244.75 1059.6,162.72 1135.32,87 1534.06,87 1580.28,133.22 1906.45,133.22 1927.16,153.92 1927.16,221.45 v1(1959.85,254.14) ; v1(2531.28,265.15) 2663.01,265.15 2672,274.14 2672,413.96 J2.8@2621,464.96
  BOT w6: v1(1959.85,254.14) 2058.58,254.14 2067.35,245.38 2178.7,245.38 2181.13,242.95 2264.79,242.95 2292.29,215.45 2415.22,215.45 2466.51,266.74 2491.41,266.74 2493,265.15 v1(2531.28,265.15)
TEMP_LOCAL: J3.2 U1.19 | length 1367.2
  TOP w6: v1(683.3,479.63) 711.55,451.43 846.2,451.43 877.62,420 v1(914,420) ; v1(1061,423) 1061.18,423.18 1061.18,458.53 U1.19@1061.36,458.71
  BOT w6: J3.2@47.69,462.6 50.6,465.5 65.3,465.5 74.16,474.36 74.16,479.39 84.61,489.84 143.76,489.84 177.41,523.49 218.79,523.49 391.61,696.31 627.2,696.31 668.32,655.19 668.32,494.66 v1(683.3,479.63) ; v1(914,420) 914,419.85 911.62,417.47 917.41,417.47 917.66,417.21 1057.49,417.21 1061,420.73 v1(1061,423)
Tx: TP43.1 U1.30 | length 388.3
  TOP w6: U1.30@1185.38,582.72 1208.28,582.72 v1(1213,578)
  BOT w6: v1(1213,578) 1266.84,578 1275.53,586.69 1347.08,586.69 1362.81,570.96 1433.35,570.96 1485.51,518.8 TP43.1@1540,518.8
U_SIPM_ADJUST0: R87A.1 U1.14 | length 1136
  TOP w6: v1(962.94,365.49) 962.94,381.91 964.06,383.04 964.06,398.65 962.94,399.77 U1.14@962.94,458.71
  BOT w6: v1(962.94,365.49) 1001.29,403.84 1214.95,403.84 1309.77,498.66 1357.53,498.66 1361.01,502.14 1383.86,502.14 1458.84,427.16 1658.93,427.16 1672.6,413.49 1807.53,413.49 1821.46,427.42 R87A.1@1821.46,511.6
U_SIPM_ADJUST1: R87B.1 U1.15 | length 1559
  TOP w6: U1.15@982.62,458.71 982.62,353.95 v1(985.2,351.38) ; v1(1266.84,414.77) v1@1305,414.77
  BOT w6: v1(985.2,351.38) 1096.17,351.38 1135.78,390.98 1243.06,390.98 v1(1266.84,414.77) ; v1(1305,415) 1305,413.64 1317.36,401.28 1393.89,401.28 1406.09,413.49 1654.63,413.49 1666.63,401.49 1853.04,401.49 1860.24,408.69 1897.8,408.69 1905.23,416.12 1905.23,424.52 1934.97,454.27 1990.37,454.27 1996.71,460.61 2059.63,460.61 2112.27,407.96 2230.66,407.96 2247.25,424.55 R87B.1@2247.25,512.23
U_SIPM_MEAS0: C134A.2 R94A.1 R154A.2 U1.12 | length 2682.6
  TOP w6: U1.12@917.66,484.3 917.66,442.99 932.84,427.8 932.84,162.54 995.2,100.19 999.05,100.19 1026.84,72.39 1026.84,68.54 1052.39,43 1919.4,43 1987.24,110.84 1987.24,184.92 2031.08,228.76 2031.08,232.64 2067.84,269.4 2067.84,371.49 v1(2067.35,371.99) ; v1(1624,372) 1624.25,372.25 1624.25,378.84 1626.84,381.43 1626.84,621.39 1656.72,651.27 R94A.1@1683.46,651.27
  TOP w10: R154A.2@1671.53,720.28 1671.53,709.9 1675.53,705.9 R94A.1@1675.53,670.28 ; R154A.2@1675.22,723.78 1676.22,724.78 C134A.2@1714.6,724.78
  BOT w6: v1(1624,372) 1839.11,372 1864.8,397.69 1879.58,397.69 1890.03,387.23 1890.03,364.24 1915.03,339.24 1966.67,339.24 1969.75,336.16 2021.39,336.16 2032.16,346.92 2032.16,358.39 2045.76,371.99 v1(2067.35,371.99)
U_SIPM_MEAS1: C134B.2 R94B.1 R154B.2 U1.13 | length 2094
  TOP w6: U1.13@943.25,458.71 943.66,458.3 943.66,433.96 944.84,432.78 944.84,166.1 999.76,111.19 1003.6,111.19 1037.84,76.95 1037.84,73.1 1056.94,54 1914.85,54 1973.84,113 1973.84,227.35 1988.69,242.2 1988.69,245.77 2031.2,288.27 2031.2,345.96 2031.84,346.61 2031.84,361.22 2038.16,367.54 2038.16,631.68 2058.37,651.9 R94B.1@2078.36,651.9
  TOP w10: R94B.1@2099.25,667.84 2099.25,726.43 R154B.2@2103.65,726.43 C134B.2@2145.35,726.43
USB_D_N: J10.A7 J10.B7 U1.32 | length 1122.7
  TOP w6: U1.32@1185.38,622.09 1186.11,621.36 1203.94,621.36 ; v1(1368,176) 1368,203.43 J10.A7@1368.11,203.54 ; J10.B7@1387.8,268.9 1387.8,291.8 v1(1398,302) ; v1(1589.14,345.36) 1596.63,345.36 1593.16,348.83 1593.16,384.78 1593.57,385.19 1593.57,456.08 1593.16,456.5 1593.16,459.84 1596,462.68 v1(1596,466.39)
  BOT w6: v1(1213,616) 1197.03,616 1185.75,604.72 1185.75,562.67 1199.42,549 1349.38,549 1352.22,551.84 1409.58,551.84 1476.62,484.8 1577.58,484.8 v1(1596,466.39) ; v1(1368,176) 1369.53,177.53 1369.53,274.53 1397,302 v1(1398,302) 1395.38,304.62 1395.38,309.59 1395.31,309.66 1402.13,316.49 1402.13,323.15 1413.17,334.19 1428.78,334.19 1429.61,333.36 1438.8,333.36 1458.93,353.49 1521.6,353.49 1541.66,333.43 1578.91,333.43 1590.83,345.36 v1(1589.14,345.36)
USB_D_P: J10.A6 J10.B6 U1.33 | length 1051.9
  TOP w6: U1.33@1185.38,641.78 v1@1214.87,641.78 ; v1(1382,323) 1382,320.67 1369.84,308.51 1369.84,270.63 J10.B6@1368.11,268.9 1368.11,246.06 1383.02,231.16 1383.02,219.15 1387.8,214.37 J10.A6@1387.8,203.54 ; v1(1567,361) 1578.13,361 1581.16,364.03 1581.16,389.75 1581.57,390.16 1581.57,451.11 v1(1570,462.68)
  BOT w6: v1(1214.9,641.81) 1205.87,641.81 1173.75,609.69 1173.75,557.7 1194.45,537 1354.35,537 1357.2,539.84 1404.61,539.84 1471.65,472.8 1547.66,472.8 1555.16,465.3 1567.38,465.3 v1(1570,462.68) ; v1(1382,323) 1408.5,349.5 1437.97,349.5 1453.96,365.49 1526.57,365.49 1546.63,345.43 1565.43,345.43 1567,347 v1(1567,361)
pads on no net: B1.1 B2.1 D22.2 Designator12.A1 Designator12.A2 Designator12.A3 Designator12.A4 Designator12.A5 Designator12.A6 Designator12.A7 Designator12.A8 Designator12.A9 Designator12.A10 Designator12.A11 Designator12.A12 Designator12.B1 Designator12.B2 Designator12.B3 Designator12.B4 Designator12.B5 Designator12.B6 Designator12.B7 Designator12.B8 Designator12.B9 Designator12.B10 Designator12.B11 Designator12.B12 Designator12.G1 Designator12.G2 Designator12.G3 Designator12.G4 Designator12.G5 Designator12.G6 Designator12.SHIELD IC5.6 IC5.9 IC5.11 IC8.9 IC20A.3 IC20A.6 IC20A.7 IC20B.3 IC20B.6 IC20B.7 J3.MECH J10.M1 J10.M2 JP10.6 JP10.7 JP10.8 U1.2 U1.3 U1.4 U1.25 U1.26 U1.38 U1.39 U1.40 U1.41 U1.44
copper on no net:
  other v1: 409.11,227.83 409.11,267.2

## Polygon pours and split planes (outlines as drawn)
GND on G1 (split plane): 2735.81,739.71 2735.81,47.69 2708.21,20.1 47.69,20.1 20.1,47.69 20.1,739.71 47.69,767.3 2708.21,767.3
P5V0 on PWR (split plane): 2735.81,739.71 2735.81,47.69 2708.21,20.1 2215.34,20.1 2215.34,34.4 2214.95,36.35 2213.85,38 2212.2,39.11 2210.24,39.5 2208.29,39.11 2206.64,38 2205.53,36.35 2205.15,34.4 2205.15,20.1 47.69,20.1 20.1,47.69 20.1,739.71 47.69,767.3 820.9,767.3 820.9,511.38 678.67,369.15 677.57,367.5 677.18,365.55 677.18,270.39 677.57,268.44 678.67,266.79 697.06,248.4 698.72,247.29 700.67,246.9 1067.39,246.9 1069.34,247.29 1071,248.4 1072.1,250.05 1072.49,252 1072.49,317.02 1141.21,385.74 1872.41,385.74 1981.47,276.68 1983.12,275.58 1985.07,275.19 2226.31,275.19 2277.71,223.8 2277.71,93.59 2278.09,91.64 2279.2,89.99 2299.36,69.83 2301.01,68.72 2302.96,68.33 2634.03,68.33 2635.99,68.72 2637.64,69.83 2682.35,114.53 2683.45,116.19 2683.84,118.14 2683.84,172.34 2683.45,174.29 2682.35,175.94 2617.39,240.9 2615.73,242.01 2613.78,242.39 2561.24,242.39 2513.14,290.5 2513.14,767.3 2708.21,767.3
P3V3 on PWR (split plane): 2502.94,288.39 2503.33,286.44 2504.43,284.78 2555.53,233.69 2557.18,232.59 2559.13,232.2 2611.67,232.2 2673.64,170.22 2673.64,120.25 2631.92,78.53 2305.08,78.53 2287.9,95.7 2287.9,225.91 2287.51,227.86 2286.41,229.51 2232.03,283.89 2230.37,285 2228.42,285.39 1987.18,285.39 1878.12,394.45 1876.47,395.55 1874.52,395.94 1139.1,395.94 1137.15,395.55 1135.5,394.45 1063.79,322.74 1062.68,321.09 1062.29,319.14 1062.29,257.1 702.78,257.1 687.38,272.5 687.38,363.43 829.6,505.66 830.71,507.32 831.1,509.27 831.1,767.3 2502.94,767.3

## Keep-outs
KeepOutLayer:
  the board outline again, w10

## Other copper
PWR (plane layer: these items are gaps in the copper):
  lines w10: 826,790 826,509.27 682.28,365.55 682.28,270.39 700.67,252 885.8,252 1067.39,252 1067.39,319.14 1139.1,390.84 1386.84,390.84 1853.8,390.84 ; 1840.96,390.84 1874.52,390.84 1985.07,280.29 2228.42,280.29 2282.8,225.91 2282.8,93.59 2302.96,73.43 2634.03,73.43 2678.74,118.14 2678.74,172.34 2613.78,237.3 2559.13,237.3 2508.04,288.39 2508.04,785.04 ; 2210.24,0 2210.24,34.4

## Silkscreen, mask and mechanical layers (free items; w line width, h text height)
BottomOverlay:
  text "GND" at 1743.35,681.15 h30
  text "Rx" at 1667.01,592.46 h30
  text "Tx" at 1655.84,504.43 h30
BottomSolder:
  lines w19.68: 966.33,505.41 cw(c964.91,505.95) 966.35,506.46 ; 966.33,548.71 cw(c964.91,549.26) 966.35,549.77 ; 966.33,592.02 cw(c964.91,592.57) 966.35,593.07 ; 966.33,635.33 cw(c964.91,635.87) 966.35,636.38 ; 966.33,678.63 cw(c964.91,679.18) 966.35,679.69 ; 1009.64,505.91 cw(c1008.21,506.46) 1009.66,506.96 ; 1009.64,549.22 cw(c1008.21,549.77) 1009.66,550.27 ; 1009.64,592.53 cw(c1008.21,593.07) 1009.66,593.58 ; 1009.64,635.83 cw(c1008.21,636.38) 1009.66,636.89 ; 1009.64,679.14 cw(c1008.21,679.69) 1009.66,680.19 ; 1052.95,505.41 cw(c1051.52,505.95) 1052.96,506.46 ; 1052.95,548.71 cw(c1051.52,549.26) 1052.96,549.77 ; 1052.95,592.02 cw(c1051.52,592.57) 1052.96,593.07 ; 1052.95,635.33 cw(c1051.52,635.87) 1052.96,636.38 ; 1052.95,678.63 cw(c1051.52,679.18) 1052.96,679.69 ; 1096.26,505.41 cw(c1094.83,505.95) 1096.27,506.46 ; 1096.26,548.71 cw(c1094.83,549.26) 1096.27,549.77 ; 1096.26,592.02 cw(c1094.83,592.57) 1096.27,593.07 ; 1096.26,635.33 cw(c1094.83,635.87) 1096.27,636.38 ; 1096.26,678.63 cw(c1094.83,679.18) 1096.27,679.69 ; 1139.56,505.41 cw(c1138.13,505.95) 1139.58,506.46 ; 1139.56,548.71 cw(c1138.13,549.26) 1139.58,549.77 ; 1139.56,592.02 cw(c1138.13,592.57) 1139.58,593.07 ; 1139.56,635.33 cw(c1138.13,635.87) 1139.58,636.38 ; 1139.56,678.63 cw(c1138.13,679.18) 1139.58,679.69 ; 1677.25,449.55 cw(c1675.83,450.1) 1677.27,450.61 ; 1677.25,503.89 cw(c1675.83,504.43) 1677.27,504.94 ; 1706.39,476.72 cw(c1704.96,477.27) 1706.4,477.77 ; 1735.52,449.55 cw(c1734.09,450.1) 1735.54,450.61 ; 1735.52,503.89 cw(c1734.09,504.43) 1735.54,504.94 ; 2103.04,450.18 cw(c2101.61,450.73) 2103.06,451.24 ; 2103.04,504.52 cw(c2101.61,505.06) 2103.06,505.57 ; 2132.18,477.35 cw(c2130.75,477.9) 2132.19,478.4 ; 2161.31,450.18 cw(c2159.88,450.73) 2161.33,451.24 ; 2161.31,504.52 cw(c2159.88,505.06) 2161.33,505.57 ; 2344.42,142.1 cw(c2342.99,142.65) 2344.43,143.16 ; 2344.42,193.17 cw(c2342.99,193.72) 2344.43,194.22 ; 2366,166.37 cw(c2367.53,166.37) 2368.97,166.88 ; 2392.22,142.15 ccw(c2393.99,142.65) 2392.23,143.2 ; 2395.42,193.17 cw(c2393.99,193.72) 2395.43,194.22
Mechanical1:
  the board outline again, w10

## Dimensions
0,0 to 2755.91,39.37 on Mechanical2
0,-59.06 to 2125.98,118.11 on Mechanical2
0,0 to 629.92,118.11 on Mechanical2